# Altium PCB HK0J2071758B02-AM-FPC-A1.PcbDoc (part 1 of 2)
Units mm, origin at the board's own origin, x right, y up, seen from the top; angles counter-clockwise.
Board outline 42.12 x 32.69 mm, 10 copper layers (TopLayer, MidLayer1, MidLayer2, MidLayer3, MidLayer4, MidLayer5, MidLayer6, MidLayer7, MidLayer8, BottomLayer); 37 components, 50 nets, 198 pads, 150 vias.
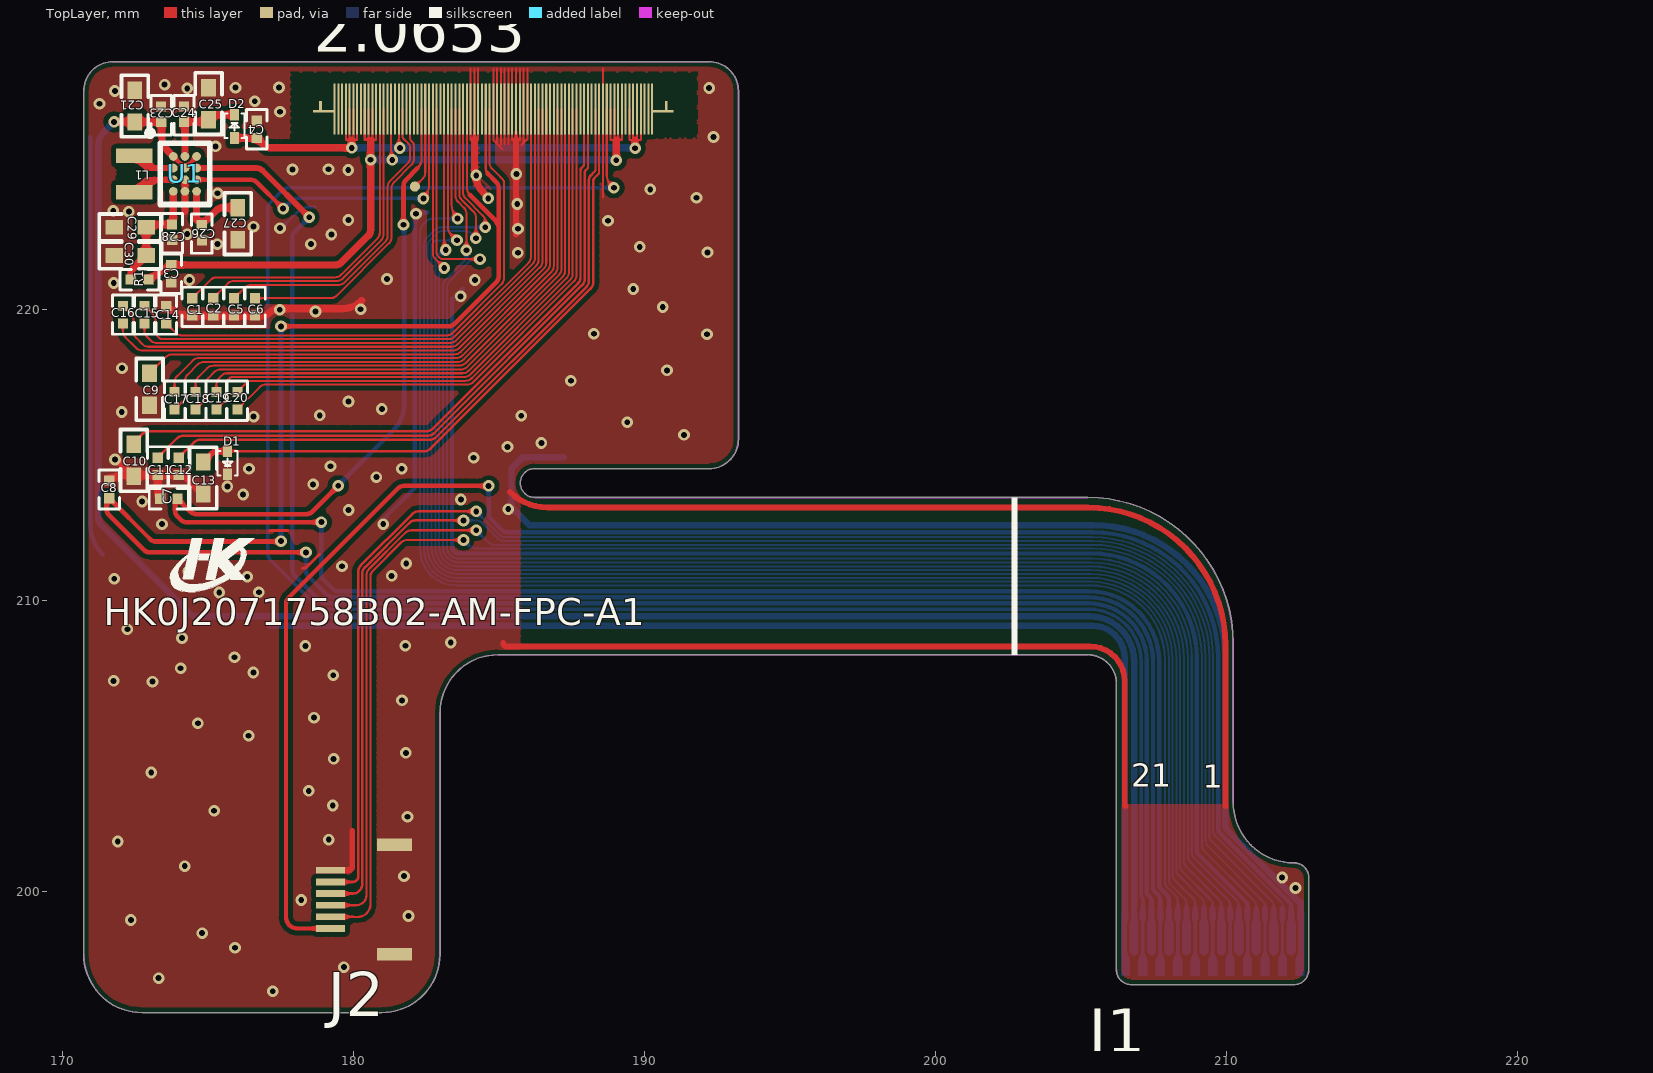
[diagram p0: TopLayer view]
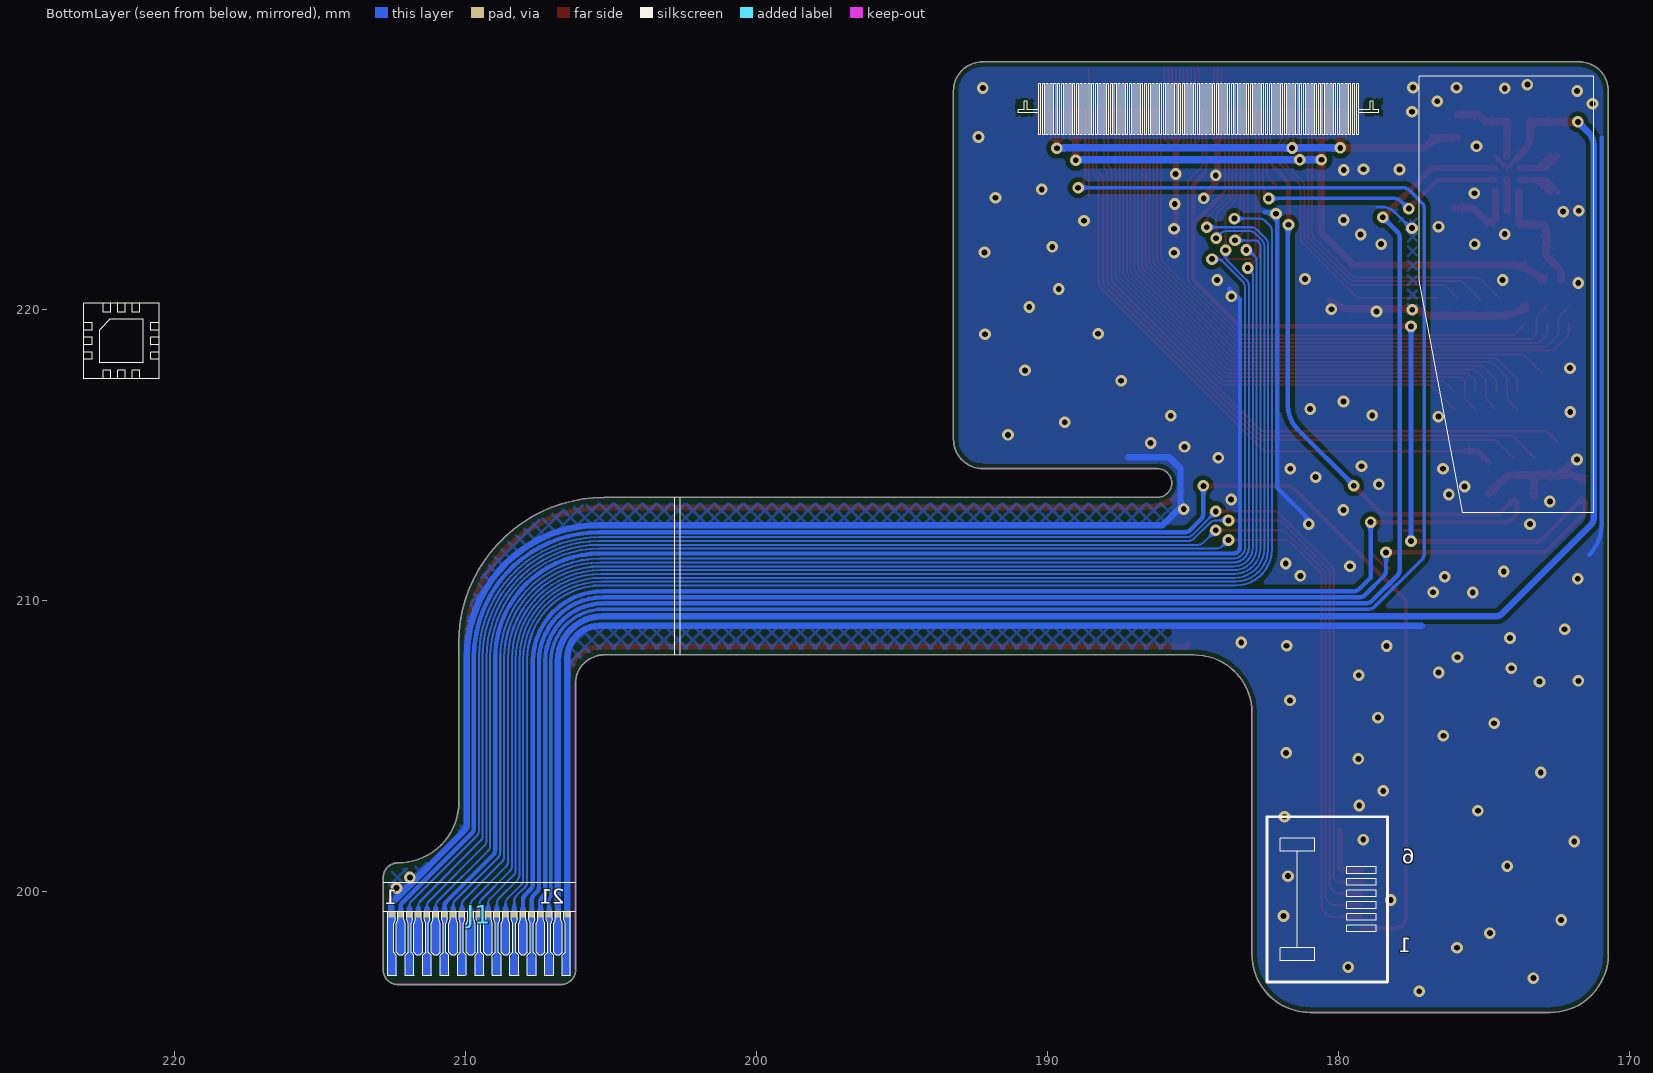
[diagram p1: BottomLayer view, seen from below]

## Layer stack, top to bottom
TopSolder: solder mask 0.0102, Solder Resist, Dk 3.5
TopLayer: signal copper 0.0356
Dielectric1: core 0.32, FR-4, Dk 4.8
MidLayer1: signal copper 0.0356
Dielectric2: prepreg 0.32, FR-4, Dk 4.8
MidLayer2: signal copper 0.0356
Dielectric3: core 0.32, FR-4, Dk 4.8
MidLayer3: signal copper 0.0356
Dielectric4: prepreg 0.32, FR-4, Dk 4.8
MidLayer4: signal copper 0.0356
Dielectric5: core 0.32, FR-4, Dk 4.8
MidLayer5: signal copper 0.0356
Dielectric6: prepreg 0.32, FR-4, Dk 4.8
MidLayer6: signal copper 0.0356
Dielectric7: core 0.32, FR-4, Dk 4.8
MidLayer7: signal copper 0.0356
Dielectric8: prepreg 0.32, FR-4, Dk 4.8
MidLayer8: signal copper 0.0356
Dielectric9: core 0.32, FR-4, Dk 4.8
BottomLayer: signal copper 0.0356
BottomSolder: solder mask 0.0102, Solder Resist, Dk 3.5

## Board outline
172.73,195.824 cw(c172.73,197.83) 170.724,197.83 cw(c170.73,197.83) 170.724,197.831 170.724,227.509 cw(c171.73,227.509) 171.73,228.516 192.23,228.516 cw(c192.23,227.509) 193.237,227.509 193.237,215.53 cw(c192.23,215.53) 192.23,214.524 186.23,214.524 ccw(c186.23,214.53) 186.23,214.524 ccw(c186.23,214.03) 186.23,213.537 205.235,213.537 cw(c205.235,208.53) 210.241,208.53 210.241,203.067 cw(c210.235,203.067) 210.241,203.067 cw(c212.335,203.067) 210.241,203.067 ccw(c212.335,203.067) 212.335,200.974 cw(c212.335,200.967) 212.335,200.974 cw(c212.331,200.421) 212.355,200.973 cw(c212.331,200.427) 212.369,200.973 cw(c212.331,200.432) 212.38,200.972 cw(c212.38,200.965) 212.381,200.972 cw(c212.332,200.438) 212.391,200.971 cw(c212.39,200.964) 212.391,200.971 212.4,200.97 ccw(c212.399,200.963) 212.4,200.97 cw(c212.399,200.963) 212.4,200.97 212.408,200.968 cw(c212.407,200.962) 212.408,200.968 212.416,200.967 cw(c212.415,200.961) 212.416,200.967 212.423,200.966 cw(c212.422,200.959) 212.424,200.966 cw(c212.422,200.959) 212.424,200.966 212.431,200.965 cw(c212.429,200.958) 212.431,200.965 cw(c212.429,200.958) 212.431,200.965 212.437,200.963 cw(c212.436,200.957) 212.438,200.963 212.444,200.962 cw(c212.443,200.955) 212.444,200.962 212.45,200.96 ccw(c212.449,200.954) 212.45,200.96 212.456,200.959 cw(c212.455,200.952) 212.457,200.959 212.462,200.958 212.468,200.956 cw(c212.466,200.949) 212.468,200.956 212.474,200.954 cw(c212.472,200.948) 212.474,200.954 cw(c212.472,200.948) 212.474,200.954 cw(c212.473,200.948) 212.475,200.954 cw(c212.473,200.948) 212.475,200.954 cw(c212.337,200.476) 212.504,200.945 cw(c212.337,200.476) 212.504,200.945 cw(c212.332,200.461) 212.627,200.881 cw(c212.623,200.876) 212.627,200.881 ccw(c212.338,200.47) 212.627,200.881 cw(c212.338,200.47) 212.749,200.759 cw(c212.743,200.755) 212.749,200.759 cw(c212.329,200.464) 212.812,200.636 cw(c212.806,200.634) 212.812,200.636 cw(c212.344,200.47) 212.822,200.607 cw(c212.815,200.605) 212.822,200.607 212.823,200.601 ccw(c212.817,200.6) 212.823,200.601 cw(c212.817,200.6) 212.823,200.601 212.825,200.596 212.825,200.595 212.826,200.589 cw(c212.82,200.588) 212.827,200.589 212.828,200.583 cw(c212.821,200.582) 212.828,200.583 cw(c212.821,200.582) 212.828,200.583 212.829,200.577 cw(c212.823,200.575) 212.829,200.577 cw(c212.823,200.575) 212.829,200.577 212.831,200.57 cw(c212.824,200.569) 212.831,200.57 212.832,200.563 cw(c212.826,200.562) 212.832,200.563 212.833,200.556 cw(c212.827,200.555) 212.834,200.556 212.835,200.549 ccw(c212.828,200.548) 212.835,200.549 212.836,200.541 cw(c212.829,200.54) 212.836,200.541 212.837,200.532 cw(c212.83,200.531) 212.837,200.532 cw(c212.31,200.465) 212.838,200.523 cw(c212.305,200.464) 212.839,200.512 cw(c212.3,200.464) 212.84,200.501 cw(c212.833,200.5) 212.84,200.5 212.84,200.501 cw(c212.294,200.463) 212.841,200.486 cw(c212.289,200.463) 212.841,200.467 cw(c212.835,200.467) 212.841,200.467 212.841,197.292 cw(c212.835,197.292) 212.841,197.292 ccw(c212.335,197.292) 212.841,197.292 cw(c212.335,197.292) 212.335,196.785 206.735,196.785 cw(c206.735,197.292) 206.228,197.292 cw(c206.735,197.292) 206.228,197.292 ccw(c206.235,197.292) 206.228,197.292 206.228,207.13 ccw(c205.175,207.126) 206.228,207.13 ccw(c205.175,207.126) 206.227,207.177 ccw(c205.175,207.126) 206.227,207.177 ccw(c206.233,207.177) 206.227,207.177 ccw(c205.186,207.126) 206.225,207.207 ccw(c205.186,207.126) 206.225,207.207 cw(c206.232,207.207) 206.225,207.207 cw(c205.196,207.127) 206.225,207.207 ccw(c206.232,207.207) 206.225,207.207 ccw(c205.196,207.127) 206.223,207.231 ccw(c205.206,207.128) 206.223,207.231 ccw(c205.206,207.128) 206.22,207.252 ccw(c205.206,207.128) 206.22,207.252 ccw(c205.217,207.129) 206.218,207.271 ccw(c205.217,207.129) 206.218,207.271 ccw(c205.217,207.129) 206.218,207.271 ccw(c206.225,207.272) 206.218,207.271 206.215,207.288 206.213,207.304 206.21,207.319 206.207,207.333 206.204,207.347 cw(c206.211,207.349) 206.204,207.347 206.201,207.36 206.201,207.362 ccw(c205.244,207.133) 206.182,207.429 ccw(c205.244,207.133) 206.182,207.429 cw(c206.188,207.431) 206.182,207.429 cw(c205.227,207.127) 206.182,207.429 ccw(c206.188,207.431) 206.182,207.429 ccw(c205.227,207.127) 206.116,207.589 ccw(c205.227,207.127) 206.116,207.589 cw(c206.122,207.592) 206.116,207.589 ccw(c205.241,207.134) 206.082,207.649 ccw(c205.235,207.13) 205.754,207.977 cw(c205.757,207.983) 205.753,207.977 ccw(c205.239,207.137) 205.693,208.011 ccw(c205.239,207.137) 205.693,208.011 ccw(c205.231,207.122) 205.534,208.077 ccw(c205.231,207.122) 205.534,208.078 ccw(c205.536,208.084) 205.534,208.077 205.534,208.078 ccw(c205.237,207.14) 205.534,208.078 ccw(c205.237,207.14) 205.467,208.096 ccw(c205.237,207.14) 205.466,208.096 cw(c205.468,208.103) 205.466,208.096 205.453,208.099 205.439,208.102 205.425,208.105 205.41,208.108 205.394,208.111 cw(c205.235,207.123) 205.394,208.111 ccw(c205.235,207.123) 205.376,208.113 cw(c205.377,208.12) 205.376,208.113 ccw(c205.234,207.113) 205.358,208.116 ccw(c205.234,207.113) 205.357,208.116 ccw(c205.358,208.123) 205.358,208.116 205.357,208.116 ccw(c205.233,207.103) 205.337,208.118 ccw(c205.232,207.092) 205.336,208.118 ccw(c205.232,207.092) 205.312,208.12 cw(c205.313,208.127) 205.312,208.12 ccw(c205.231,207.082) 205.283,208.122 ccw(c205.231,207.082) 205.282,208.122 ccw(c205.23,207.07) 205.236,208.124 205.235,208.124 ccw(c205.235,208.13) 205.235,208.124 ccw(c205.236,208.13) 205.236,208.124 205.235,208.124 184.97,208.124 ccw(c184.97,206.13) 182.977,206.13 182.977,197.83 ccw(c182.97,197.83) 182.977,197.831 182.977,197.83 cw(c180.97,197.83) 180.97,195.824

## Design rules (kind name [scope] priority, off if disabled: settings)
Clearance [All] p1: gap=0.06 ignorepadtopadclearanceinfootprint=FALSE
ComponentClearance [All] p1: gap=-0.04 collisioncheckmode=3 verticalgap=-0.04 showdistances=FALSE
FabricationTestPointUsage TestPointUsage [All] p1: valid=0 allowmultiple=FALSE
FabricationTestpoint Testpoint [All] p1: side=3 testpointundercomponent=TRUE minsize=1.016 maxsize=2.54 preferedsize=1.524 minholesize=0.508 maxholesize=1.016 preferedholesize=0.813 testpointgrid=0.025 allowsidetop=TRUE allowsidebottom=TRUE usegrid=TRUE gridtolerance=0
PasteMaskExpansion PasteMaskExpansion_1 [InComponent('P1')] p1: expansion=-3.81
PasteMaskExpansion [All] p2: expansion=0
PlaneClearance [All] p1: clearance=0.254
PolygonConnect [All] p1: connectstyle=Direct reliefconductorwidth=0.254 reliefentries=4 polygonreliefangle="90 Angle" airgapwidth=0.254
RoutingVias [All] p1: holewidth=0.711 width=1.27 viastyle="Through Hole" minholewidth=0.711 minwidth=1.27 maxholewidth=0.711 maxwidth=1.27
SilkToSolderMaskClearance SilkscreenOverComponentPads [IsPad] p1: minsilkscreentomaskgap=0.254 clearancetoexposedcopper=TRUE
SolderMaskExpansion [All] p1: expansion=0.051
Width [All] p1: maxlimit=0.254 minlimit=0.06 preferedwidth=0.254
24 further rules are at their usual default settings.

## Classes and differential pairs
component class "AT long bus (13.3 x 4.5 inches)": P?

## Components (designator, comment, footprint, x,y, rotation, side; value= is the part's Value field where it differs from the comment)
2.0653 "2.0653-CH13613" GVO2.08-CH13613 184.186,223.315 r0 top
C1 "CAP" 0201-FPC#1 174.494,220.584 r270 top
C2 "CAP" 0201-FPC#1 175.214,220.584 r270 top
C3 "CAP" 0201-FPC#1 173.775,221.727 r270 top
C4 "CAP" 0201-FPC#1 176.639,225.694 r90 top
C5 "CAP" 0201-FPC#1 175.934,220.584 r270 top
C6 "CAP" 0201-FPC#1 176.654,220.584 r270 top
C7 "CAP" 0201-FPC#1 174.154,213.449 r180 top
C8 "CAP" 0201-FPC#1 171.566,213.308 r90 top
C9 "CAP" 0402-FPC 172.991,217.802 r270 top
C10 "CAP" 0402-FPC 172.447,215.361 r270 top
C11 "CAP" 0201-FPC#1 173.308,215.101 r270 top
C12 "CAP" 0201-FPC#1 174.028,215.101 r270 top
C13 "CAP" 0402-FPC 174.834,214.753 r270 top
C14 "CAP" 0201-FPC#1 173.527,219.318 r90 top
C15 "CAP" 0201-FPC#1 172.853,220.318 r270 top
C16 "CAP" 0201-FPC#1 172.109,220.318 r270 top
C17 "CAP" 0201-FPC#1 173.885,217.36 r270 top
C18 "CAP" 0201-FPC#1 174.609,217.36 r270 top
C19 "CAP" 0201-FPC#1 175.326,217.36 r270 top
C20 "CAP" 0201-FPC#1 176.045,217.36 r270 top
C21 "CAP" 0402-FPC 172.484,226.44 r90 top
C23 "CAP" 0201-FPC#2 173.35,226.171 r90 top
C24 "CAP" 0201-FPC#2 174.136,226.174 r90 top
C25 "CAP" 0402-FPC 175.017,226.523 r90 top
C26 "CAP" 0201-FPC#2 174.749,222.103 r90 top
C27 "CAP" 0402-FPC 176.025,222.396 r90 top
C28 "CAP" 0201-FPC#2 173.729,222.118 r90 top
C29 "CAP" 0402-FPC 172.873,222.821 r180 top
C30 "CAP" 0402-FPC 172.873,221.854 r180 top
D1 "RB520G-30" SOD-923 176.014,217.055 r270 top
D2 "RB520G-30" SOD-923 175.568,223.963 r90 top
J1 "OK-23GM024-04" FH26-21 208.819,199.176 r0 top
J2 "TP" OK-F401-06125 179.211,198.715 r90 top
L1 "Power Inductor" MPL2012S2R2MDT 200.403,348.491 r90 top
R1 "10Ω/0402" 0201-FPC#1 173.144,220.985 r180 top
U1 "BV6810A" BV6810A 148.28,282.781 r0 top

## Footprints (in the part's own frame and the unit in brackets; to place one, negate y for a bottom-side part, rotate by r counter-clockwise, add the part's x,y. Pads: shape width x height; smd on the part's side, far side on the other; paste and mask are expansions set on the pad)
0201-FPC#1 [mm]
  rect 0.35x0.35 smd: 1(0.2,-0.037) 2(0.8,-0.037)
  silkscreen extent -0.18,-0.39 1.17,0.31
0201-FPC#2 [mm]
  rect 0.35x0.35 smd: 1(0.273,-0.04) 2(0.8,-0.037)
  silkscreen extent -0.18,-0.39 1.17,0.31
0402-FPC [mm]
  rect 0.6x0.508 smd: 1(0,0) 2(1.1,0)
  silkscreen extent -0.51,-0.46 1.61,0.46
BV6810A [mm]
  round 0.3 smd: A1(25.526,-57.523) A2(25.926,-57.523) A3(26.326,-57.523) B1(25.526,-57.923) B2(25.926,-57.923) B3(26.326,-57.923) C1(25.526,-58.323) C2(25.926,-58.323) C3(26.326,-58.323) D1(25.526,-58.723) D2(25.926,-58.723) D3(26.326,-58.723)
  silkscreen extent 24.63,-59.17 26.78,-56.62
FH26-21 [mm]
  rect 0.2x0.2 smd far side: 1(3.742,0.017) 1(3.742,0.017) 2(3.417,0.017) 3(3.117,0.017) 4(2.817,0.017) 5(2.517,0.017) 6(2.217,0.017) 7(1.917,0.017) 8(1.617,0.017) 9(1.317,0.017) 10(1.017,0.017) 11(0.717,0.017) 12(0.417,0.017) 13(0.117,0.017) 14(-0.183,0.017) 15(-0.483,0.017) 16(-0.783,0.017) 17(-1.083,0.017) 18(-1.383,0.017) 19(-1.683,0.017) 20(-1.983,0.017) 21(-2.308,0.017)
  BottomLayer region: -0.633,-2.083 -0.633,-1.584 -0.628,-1.526 -0.611,-1.469 -0.611,-1.469 -0.556,-1.338 -0.539,-1.282 -0.533,-1.223 -0.533,-1.223 -0.533,-0.316 -0.536,-0.284 -0.544,-0.252 -0.544,-0.252 -0.578,-0.149 -0.582,-0.133 -0.583,-0.117 -0.583,-0.117 -0.583,0.117 -0.383,0.117 -0.383,-0.117 -0.385,-0.133 -0.389,-0.149 -0.389,-0.149 -0.423,-0.252 -0.431,-0.284 -0.433,-0.316 -0.433,-0.316 -0.433,-1.223 -0.428,-1.282 -0.411,-1.338 -0.411,-1.338 -0.356,-1.469 -0.339,-1.526 -0.333,-1.584 -0.333,-1.584 -0.333,-2.083
  BottomLayer region: 1.167,-2.083 1.167,-1.584 1.172,-1.526 1.189,-1.469 1.189,-1.469 1.244,-1.338 1.261,-1.282 1.267,-1.223 1.267,-1.223 1.267,-0.316 1.264,-0.284 1.256,-0.252 1.256,-0.252 1.222,-0.149 1.218,-0.133 1.217,-0.117 1.217,-0.117 1.217,0.117 1.417,0.117 1.417,-0.117 1.415,-0.133 1.411,-0.149 1.411,-0.149 1.377,-0.252 1.369,-0.284 1.367,-0.316 1.367,-0.316 1.367,-1.223 1.372,-1.282 1.389,-1.338 1.389,-1.338 1.444,-1.469 1.461,-1.526 1.467,-1.584 1.467,-1.584 1.467,-2.083
  BottomLayer region: 3.296,-1.312 3.274,-1.28 3.267,-1.242 3.267,-1.242 3.267,-0.332 3.27,-0.284 3.282,-0.237 3.282,-0.237 3.301,-0.179 3.313,-0.132 3.317,-0.084 3.317,-0.084 3.317,0.117 3.517,0.117 3.517,-0.084 3.52,-0.132 3.532,-0.179 3.532,-0.179 3.551,-0.237 3.563,-0.284 3.567,-0.332 3.567,-0.332 3.567,-1.242 3.559,-1.28 3.537,-1.312 3.537,-1.312 3.467,-1.383 3.367,-1.383
  BottomLayer region: -1.833,-2.083 -1.833,-1.584 -1.828,-1.526 -1.811,-1.469 -1.811,-1.469 -1.756,-1.338 -1.739,-1.282 -1.733,-1.223 -1.733,-1.223 -1.733,-0.316 -1.736,-0.284 -1.744,-0.252 -1.744,-0.252 -1.778,-0.149 -1.782,-0.133 -1.783,-0.117 -1.783,-0.117 -1.783,0.117 -1.583,0.117 -1.583,-0.117 -1.585,-0.133 -1.589,-0.149 -1.589,-0.149 -1.623,-0.252 -1.631,-0.284 -1.633,-0.316 -1.633,-0.316 -1.633,-1.223 -1.628,-1.282 -1.611,-1.338 -1.611,-1.338 -1.556,-1.469 -1.539,-1.526 -1.533,-1.584 -1.533,-1.584 -1.533,-2.083
  BottomLayer region: -2.104,-1.312 -2.126,-1.28 -2.133,-1.242 -2.133,-1.242 -2.133,-0.332 -2.13,-0.284 -2.118,-0.237 -2.118,-0.237 -2.099,-0.179 -2.087,-0.132 -2.083,-0.084 -2.083,-0.084 -2.083,0.117 -1.883,0.117 -1.883,-0.084 -1.88,-0.132 -1.868,-0.179 -1.868,-0.179 -1.849,-0.237 -1.837,-0.284 -1.833,-0.332 -1.833,-0.332 -1.833,-1.242 -1.841,-1.28 -1.863,-1.312 -1.863,-1.312 -1.933,-1.383 -2.033,-1.383
  BottomLayer region: -1.504,-1.312 -1.526,-1.28 -1.533,-1.242 -1.533,-1.242 -1.533,-0.332 -1.53,-0.284 -1.518,-0.237 -1.518,-0.237 -1.499,-0.179 -1.487,-0.132 -1.483,-0.084 -1.483,-0.084 -1.483,0.117 -1.283,0.117 -1.283,-0.084 -1.28,-0.132 -1.268,-0.179 -1.268,-0.179 -1.249,-0.237 -1.237,-0.284 -1.233,-0.332 -1.233,-0.332 -1.233,-1.242 -1.241,-1.28 -1.263,-1.312 -1.263,-1.312 -1.333,-1.383 -1.433,-1.383
  BottomLayer region: -1.233,-2.083 -1.233,-1.584 -1.228,-1.526 -1.211,-1.469 -1.211,-1.469 -1.156,-1.338 -1.139,-1.282 -1.133,-1.223 -1.133,-1.223 -1.133,-0.316 -1.136,-0.284 -1.144,-0.252 -1.144,-0.252 -1.178,-0.149 -1.182,-0.133 -1.183,-0.117 -1.183,-0.117 -1.183,0.117 -0.983,0.117 -0.983,-0.117 -0.985,-0.133 -0.989,-0.149 -0.989,-0.149 -1.023,-0.252 -1.031,-0.284 -1.033,-0.316 -1.033,-0.316 -1.033,-1.223 -1.028,-1.282 -1.011,-1.338 -1.011,-1.338 -0.956,-1.469 -0.939,-1.526 -0.933,-1.584 -0.933,-1.584 -0.933,-2.083
  BottomLayer region: -0.904,-1.312 -0.926,-1.28 -0.933,-1.242 -0.933,-1.242 -0.933,-0.332 -0.93,-0.284 -0.918,-0.237 -0.918,-0.237 -0.899,-0.179 -0.887,-0.132 -0.883,-0.084 -0.883,-0.084 -0.883,0.117 -0.683,0.117 -0.683,-0.084 -0.68,-0.132 -0.668,-0.179 -0.668,-0.179 -0.649,-0.237 -0.637,-0.284 -0.633,-0.332 -0.633,-0.332 -0.633,-1.242 -0.641,-1.28 -0.663,-1.312 -0.663,-1.312 -0.733,-1.383 -0.833,-1.383
  BottomLayer region: -2.433,-2.083 -2.433,0.117 -2.183,0.117 -2.183,-0.101 -2.186,-0.133 -2.194,-0.164 -2.194,-0.164 -2.223,-0.252 -2.231,-0.284 -2.233,-0.316 -2.233,-0.316 -2.233,-1.223 -2.228,-1.282 -2.211,-1.338 -2.211,-1.338 -2.156,-1.469 -2.139,-1.526 -2.133,-1.584 -2.133,-1.584 -2.133,-2.083
  BottomLayer region: -0.304,-1.312 -0.326,-1.28 -0.333,-1.242 -0.333,-1.242 -0.333,-0.332 -0.33,-0.284 -0.318,-0.237 -0.318,-0.237 -0.299,-0.179 -0.287,-0.132 -0.283,-0.084 -0.283,-0.084 -0.283,0.117 -0.083,0.117 -0.083,-0.084 -0.08,-0.132 -0.068,-0.179 -0.068,-0.179 -0.049,-0.237 -0.037,-0.284 -0.033,-0.332 -0.033,-0.332 -0.033,-1.242 -0.041,-1.28 -0.063,-1.312 -0.063,-1.312 -0.133,-1.383 -0.233,-1.383
  BottomLayer region: -0.033,-2.083 -0.033,-1.584 -0.028,-1.526 -0.011,-1.469 -0.011,-1.469 0.044,-1.338 0.061,-1.282 0.067,-1.223 0.067,-1.223 0.067,-0.316 0.064,-0.284 0.056,-0.252 0.056,-0.252 0.022,-0.149 0.018,-0.133 0.017,-0.117 0.017,-0.117 0.017,0.117 0.217,0.117 0.217,-0.117 0.215,-0.133 0.211,-0.149 0.211,-0.149 0.177,-0.252 0.169,-0.284 0.167,-0.316 0.167,-0.316 0.167,-1.223 0.172,-1.282 0.189,-1.338 0.189,-1.338 0.244,-1.469 0.261,-1.526 0.267,-1.584 0.267,-1.584 0.267,-2.083
  BottomLayer region: 0.296,-1.312 0.274,-1.28 0.267,-1.242 0.267,-1.242 0.267,-0.332 0.27,-0.284 0.282,-0.237 0.282,-0.237 0.301,-0.179 0.313,-0.132 0.317,-0.084 0.317,-0.084 0.317,0.117 0.517,0.117 0.517,-0.084 0.52,-0.132 0.532,-0.179 0.532,-0.179 0.551,-0.237 0.563,-0.284 0.567,-0.332 0.567,-0.332 0.567,-1.242 0.559,-1.28 0.537,-1.312 0.537,-1.312 0.467,-1.383 0.367,-1.383
  BottomLayer region: 0.567,-2.083 0.567,-1.584 0.572,-1.526 0.589,-1.469 0.589,-1.469 0.644,-1.338 0.661,-1.282 0.667,-1.223 0.667,-1.223 0.667,-0.316 0.664,-0.284 0.656,-0.252 0.656,-0.252 0.622,-0.149 0.618,-0.133 0.617,-0.117 0.617,-0.117 0.617,0.117 0.817,0.117 0.817,-0.117 0.815,-0.133 0.811,-0.149 0.811,-0.149 0.777,-0.252 0.769,-0.284 0.767,-0.316 0.767,-0.316 0.767,-1.223 0.772,-1.282 0.789,-1.338 0.789,-1.338 0.844,-1.469 0.861,-1.526 0.867,-1.584 0.867,-1.584 0.867,-2.083
  BottomLayer region: 0.896,-1.312 0.874,-1.28 0.867,-1.242 0.867,-1.242 0.867,-0.332 0.87,-0.284 0.882,-0.237 0.882,-0.237 0.901,-0.179 0.913,-0.132 0.917,-0.084 0.917,-0.084 0.917,0.117 1.117,0.117 1.117,-0.084 1.12,-0.132 1.132,-0.179 1.132,-0.179 1.151,-0.237 1.163,-0.284 1.167,-0.332 1.167,-0.332 1.167,-1.242 1.159,-1.28 1.137,-1.312 1.137,-1.312 1.067,-1.383 0.967,-1.383
  BottomLayer region: 1.496,-1.312 1.474,-1.28 1.467,-1.242 1.467,-1.242 1.467,-0.332 1.47,-0.284 1.482,-0.237 1.482,-0.237 1.501,-0.179 1.513,-0.132 1.517,-0.084 1.517,-0.084 1.517,0.117 1.717,0.117 1.717,-0.084 1.72,-0.132 1.732,-0.179 1.732,-0.179 1.751,-0.237 1.763,-0.284 1.767,-0.332 1.767,-0.332 1.767,-1.242 1.759,-1.28 1.737,-1.312 1.737,-1.312 1.667,-1.383 1.567,-1.383
  BottomLayer region: 1.767,-2.083 1.767,-1.584 1.772,-1.526 1.789,-1.469 1.789,-1.469 1.844,-1.338 1.861,-1.282 1.867,-1.223 1.867,-1.223 1.867,-0.316 1.864,-0.284 1.856,-0.252 1.856,-0.252 1.822,-0.149 1.818,-0.133 1.817,-0.117 1.817,-0.117 1.817,0.117 2.017,0.117 2.017,-0.117 2.015,-0.133 2.011,-0.149 2.011,-0.149 1.977,-0.252 1.969,-0.284 1.967,-0.316 1.967,-0.316 1.967,-1.223 1.972,-1.282 1.989,-1.338 1.989,-1.338 2.044,-1.469 2.061,-1.526 2.067,-1.584 2.067,-1.584 2.067,-2.083
  BottomLayer region: 2.096,-1.312 2.074,-1.28 2.067,-1.242 2.067,-1.242 2.067,-0.332 2.07,-0.284 2.082,-0.237 2.082,-0.237 2.101,-0.179 2.113,-0.132 2.117,-0.084 2.117,-0.084 2.117,0.117 2.317,0.117 2.317,-0.084 2.32,-0.132 2.332,-0.179 2.332,-0.179 2.351,-0.237 2.363,-0.284 2.367,-0.332 2.367,-0.332 2.367,-1.242 2.359,-1.28 2.337,-1.312 2.337,-1.312 2.267,-1.383 2.167,-1.383
  BottomLayer region: 2.367,-2.083 2.367,-1.584 2.372,-1.526 2.389,-1.469 2.389,-1.469 2.444,-1.338 2.461,-1.282 2.467,-1.223 2.467,-1.223 2.467,-0.316 2.464,-0.284 2.456,-0.252 2.456,-0.252 2.422,-0.149 2.418,-0.133 2.417,-0.117 2.417,-0.117 2.417,0.117 2.617,0.117 2.617,-0.117 2.615,-0.133 2.611,-0.149 2.611,-0.149 2.577,-0.252 2.569,-0.284 2.567,-0.316 2.567,-0.316 2.567,-1.223 2.572,-1.282 2.589,-1.338 2.589,-1.338 2.644,-1.469 2.661,-1.526 2.667,-1.584 2.667,-1.584 2.667,-2.083
  BottomLayer region: 2.696,-1.312 2.674,-1.28 2.667,-1.242 2.667,-1.242 2.667,-0.332 2.67,-0.284 2.682,-0.237 2.682,-0.237 2.701,-0.179 2.713,-0.132 2.717,-0.084 2.717,-0.084 2.717,0.117 2.917,0.117 2.917,-0.084 2.92,-0.132 2.932,-0.179 2.932,-0.179 2.951,-0.237 2.963,-0.284 2.967,-0.332 2.967,-0.332 2.967,-1.242 2.959,-1.28 2.937,-1.312 2.937,-1.312 2.867,-1.383 2.767,-1.383
  BottomLayer region: 2.967,-2.083 2.967,-1.584 2.972,-1.526 2.989,-1.469 2.989,-1.469 3.044,-1.338 3.061,-1.282 3.067,-1.223 3.067,-1.223 3.067,-0.316 3.064,-0.284 3.056,-0.252 3.056,-0.252 3.022,-0.149 3.018,-0.133 3.017,-0.117 3.017,-0.117 3.017,0.117 3.217,0.117 3.217,-0.117 3.215,-0.133 3.211,-0.149 3.211,-0.149 3.177,-0.252 3.169,-0.284 3.167,-0.316 3.167,-0.316 3.167,-1.223 3.172,-1.282 3.189,-1.338 3.189,-1.338 3.244,-1.469 3.261,-1.526 3.267,-1.584 3.267,-1.584 3.267,-2.083
  BottomLayer region: 3.567,-2.083 3.567,-1.584 3.572,-1.526 3.589,-1.469 3.589,-1.469 3.644,-1.338 3.661,-1.282 3.667,-1.223 3.667,-1.223 3.667,-0.316 3.664,-0.284 3.656,-0.252 3.656,-0.252 3.627,-0.164 3.619,-0.133 3.617,-0.101 3.617,-0.101 3.617,0.117 3.867,0.117 3.867,-2.083
GVO2.08-CH13613 [mm]
  rect 0.1x0.35 smd: 1(-5.323,3.671) 1(6.566,3.67)
  rect 0.7x0.1 smd: 1(-5.221,3.495) 1(6.465,3.495)
  rect 0.07x1.75 smd: 1(-4.84,3.572) 2(-4.71,3.572) 3(-4.58,3.572) 4(-4.45,3.572) 5(-4.32,3.572) 6(-4.19,3.572) 7(-4.06,3.572) 8(-3.93,3.572) 9(-3.8,3.572) 10(-3.67,3.572) 11(-3.54,3.572) 12(-3.41,3.572) 13(-3.28,3.572) 14(-3.15,3.572) 15(-3.02,3.572) 16(-2.89,3.572) 17(-2.76,3.572) 18(-2.63,3.572) 19(-2.5,3.572) 20(-2.37,3.572) 21(-2.24,3.572) 22(-2.11,3.572) 23(-1.98,3.572) 24(-1.85,3.572) 25(-1.72,3.572) 26(-1.59,3.572) 27(-1.46,3.572) 28(-1.33,3.572) 29(-1.2,3.572) 30(-1.07,3.572) 31(-0.94,3.572) 32(-0.81,3.572) 33(-0.68,3.572) 34(-0.55,3.572) 35(-0.42,3.572) 36(-0.29,3.572) 37(-0.16,3.572) 38(-0.03,3.572) 39(0.1,3.572) 40(0.23,3.572) 41(0.36,3.572) 42(0.49,3.572) 43(0.62,3.572) 44(0.75,3.572) 45(0.88,3.572) 46(1.01,3.572) 47(1.14,3.572) 48(1.27,3.572) 49(1.4,3.572) 50(1.53,3.572) 51(1.66,3.572) 52(1.79,3.572) 53(1.92,3.572) 54(2.05,3.572) 55(2.18,3.572) 56(2.31,3.572) 57(2.44,3.572) 58(2.57,3.572) 59(2.7,3.572) 60(2.83,3.572) 61(2.96,3.572) 62(3.09,3.572) 63(3.22,3.572) 64(3.35,3.572) 65(3.48,3.572) 66(3.61,3.572) 67(3.74,3.572) 68(3.87,3.572) 69(4,3.572) 70(4.13,3.572) 71(4.26,3.572) 72(4.39,3.572) 73(4.52,3.572) 74(4.65,3.572) 75(4.78,3.572) 76(4.91,3.572) 77(5.04,3.572) 78(5.17,3.572) 79(5.3,3.572) 80(5.43,3.572) 81(5.56,3.572) 82(5.69,3.572) 83(5.82,3.572) 84(5.95,3.572) 85(6.08,3.572)
MPL2012S2R2MDT [mm]
  rect 0.5x1.25 smd: 1(-124.46,27.94) 2(-123.21,27.94)
OK-F401-06125 [mm]
  rect 0.43x1.2 smd: 1(-0.879,-2.202) 1(2.88,-2.202)
  rect 0.23x1 smd: 1(2.001,0) 2(1.601,0) 3(1.201,0) 4(0.801,0) 5(0.401,0) 6(0.001,0)
SOD-923 [mm]
  rect 0.4x0.3 smd: 1(1.929,-0.342) 2(2.729,-0.342)
  silkscreen extent 1.93,-0.68 2.77,0

## Part data
D1 D2: library part "DIODE VARACTOR"
J1: library part 24PIN
J2: library part 6PIN
R1: library part 电阻

## Free pads (board coordinates)
  round 0.35 smd: 3(182.11,224.222)

## Via types
v1: diameter 0.4, hole 0.2, TopLayer to BottomLayer, 150 vias

## Nets (pads, with @x,y where several pads share a name; then routed paths per layer and width w, separated by ;. In a path a pad name is that pad's centre, name@x,y a point inside that pad or via, vN(x,y) a via of type N, cw(c..) or ccw(c..) an arc to the next point about the centre after c; other vN are vias at no path point)
AVDD: 2.0653.57 C9.1 | length 20.5
  TopLayer w0.07: C9.1@172.991,217.802 173.555,218.366 cw(c173.767,218.154) 173.767,218.454 183.477,218.454 ccw(c183.477,218.754) 183.689,218.542 186.539,221.392 ccw(c186.327,221.604) 186.627,221.604 2.0653.57@186.627,226.886
AVEE: 2.0653.19 C5.1 | length 10.9
  TopLayer w0.07: C5.1@175.896,220.384 176.256,220.744 cw(c176.469,220.532) 176.469,220.832 179.476,220.832 ccw(c179.476,221.132) 179.688,220.92 181.089,222.32 ccw(c180.877,222.533) 181.177,222.533 181.177,224.212 cw(c181.477,224.212) 181.264,224.424 181.862,225.021 ccw(c181.649,225.233) 181.949,225.233 181.949,225.536 ccw(c181.699,225.536) 181.876,225.713 181.715,225.874 cw(c181.783,225.942) 181.687,225.942 2.0653.19@181.687,226.886
C11N: 2.0653.54 C15.2 | length 20.3
  TopLayer w0.07: C15.2@172.816,219.518 172.816,219.263 ccw(c173.116,219.263) 172.904,219.051 173.025,218.93 ccw(c173.232,219.137) 173.232,218.844 183.315,218.844 ccw(c183.315,219.144) 183.528,218.932 186.149,221.553 ccw(c185.937,221.765) 186.237,221.765 2.0653.54@186.237,226.886
C11P: 2.0653.53 C15.1 | length 20.4
  TopLayer w0.07: C15.1@172.816,220.118 173.107,219.827 cw(c172.895,219.615) 173.195,219.615 173.195,219.243 ccw(c173.435,219.243) 173.265,219.073 173.323,219.015 ccw(c173.422,219.115) 173.422,218.974 183.262,218.974 ccw(c183.262,219.274) 183.474,219.062 186.019,221.607 ccw(c185.807,221.819) 186.107,221.819 2.0653.53@186.107,226.886
C12N: 2.0653.56 C16.2 | length 21.6
  TopLayer w0.07: C16.2@172.072,219.518 172.072,219.25 ccw(c172.372,219.25) 172.16,219.038 172.525,218.672 ccw(c172.737,218.884) 172.737,218.584 183.423,218.584 ccw(c183.423,218.884) 183.635,218.672 186.409,221.446 ccw(c186.197,221.658) 186.497,221.658 2.0653.56@186.497,226.886
C12P: 2.0653.55 C16.1 | length 21.7
  TopLayer w0.07: C16.1@172.072,220.118 172.355,219.835 cw(c172.143,219.623) 172.443,219.623 ; 172.443,219.623 172.443,219.232 ccw(c172.743,219.232) 172.53,219.02 172.748,218.802 ccw(c172.96,219.014) 172.96,218.714 183.369,218.714 ccw(c183.369,219.014) 183.581,218.802 186.279,221.499 ccw(c186.067,221.712) 186.367,221.712 2.0653.55@186.367,226.886
C21N: 2.0653.59 C17.2 | length 20.9
  TopLayer w0.07: C17.2@173.848,216.56 174.122,216.834 ccw(c173.91,217.046) 174.21,217.046 174.21,217.542 cw(c174.51,217.542) 174.298,217.755 174.65,218.106 cw(c174.862,217.894) 174.862,218.194 183.585,218.194 ccw(c183.585,218.494) 183.797,218.282 186.799,221.284 ccw(c186.587,221.496) 186.887,221.496 2.0653.59@186.887,226.886
C21P: 2.0653.58 C17.1 | length 20.4
  TopLayer w0.07: C17.1@173.848,217.16 173.848,217.491 cw(c174.148,217.491) 173.936,217.703 174.468,218.236 cw(c174.68,218.024) 174.68,218.324 183.531,218.324 ccw(c183.531,218.624) 183.743,218.412 186.669,221.338 ccw(c186.457,221.55) 186.757,221.55 2.0653.58@186.757,226.886
C22N: 2.0653.61 C18.2 | length 20.5
  TopLayer w0.07: C18.2@174.572,216.56 174.843,216.831 ccw(c174.63,217.043) 174.93,217.043 174.93,217.436 cw(c175.23,217.436) 175.018,217.648 175.217,217.846 cw(c175.429,217.634) 175.429,217.934 183.692,217.934 ccw(c183.692,218.234) 183.904,218.022 187.059,221.176 ccw(c186.847,221.388) 187.147,221.388 2.0653.61@187.147,226.886
C22P: 2.0653.60 C18.1 | length 19.9
  TopLayer w0.07: C18.1@174.572,217.16 174.572,217.455 cw(c174.872,217.455) 174.66,217.667 174.969,217.976 cw(c175.181,217.764) 175.181,218.064 183.639,218.064 ccw(c183.639,218.364) 183.851,218.152 186.929,221.23 ccw(c186.717,221.442) 187.017,221.442 2.0653.60@187.017,226.886
C31N: 2.0653.63 C19.2 | length 20.1
  TopLayer w0.07: C19.2@175.289,216.56 175.56,216.831 ccw(c175.348,217.043) 175.648,217.043 175.648,217.457 ; 175.648,217.457 cw(c175.842,217.457) 175.705,217.594 175.752,217.641 cw(c175.832,217.561) 175.832,217.674 183.8,217.674 ccw(c183.8,217.974) 184.012,217.762 187.319,221.069 ccw(c187.107,221.281) 187.407,221.281 2.0653.63@187.407,226.886
C31P: 2.0653.62 C19.1 | length 19.5
  TopLayer w0.07: C19.1@175.289,217.16 175.289,217.42 cw(c175.589,217.42) 175.377,217.632 175.478,217.733 cw(c175.65,217.561) 175.65,217.804 183.746,217.804 ccw(c183.746,218.104) 183.958,217.892 187.189,221.123 ccw(c186.977,221.335) 187.277,221.335 2.0653.62@187.277,226.886
C41N: 2.0653.64 C20.1 | length 18.9
  TopLayer w0.07: C20.1@176.008,217.16 176.304,217.456 cw(c176.516,217.244) 176.516,217.544 183.854,217.544 ccw(c183.854,217.844) 184.066,217.632 187.449,221.015 ccw(c187.237,221.227) 187.537,221.227 2.0653.64@187.537,226.886
C41P: 2.0653.65 C20.2 | length 19.3
  TopLayer w0.07: C20.2@176.008,216.56 176.774,217.326 cw(c176.986,217.114) 176.986,217.414 183.908,217.414 ccw(c183.908,217.714) 184.12,217.502 187.579,220.961 ccw(c187.367,221.173) 187.667,221.173 2.0653.65@187.667,226.886
CS: 2.0653.33 J1.9 | length 52.7
  TopLayer w0.07: 2.0653.33@183.507,226.886 183.507,223.906 ccw(c183.807,223.906) 183.595,223.694 183.794,223.494 cw(c183.582,223.282) 183.882,223.282 v1(183.882,222.031)
  BottomLayer w0.075: v1(183.882,222.031) 183.882,221.857 cw(c183.586,221.857) 183.796,221.648 183.167,221.02 ccw(c183.379,220.807) 183.079,220.807 183.079,211.83 ccw(c183.609,211.83) 183.609,211.3 205.372,211.3 cw(c205.372,207.987) 208.685,207.987 208.685,201.184 ccw(c208.935,201.184) 208.758,201.007 210.064,199.701 cw(c209.892,199.529) 210.136,199.529 210.136,199.386
  BottomLayer w0.2: J1.9@210.136,199.193 210.136,199.386
DVDD: 2.0653.42 C14.1 | length 18.6
  TopLayer w0.07: 2.0653.42@184.677,226.886 184.677,225.044 ccw(c184.977,225.044) 184.765,224.832 185.06,224.536
  TopLayer w0.075: C14.1@173.564,219.518 173.888,219.194 ccw(c174.1,219.407) 174.1,219.107 183.207,219.107 ccw(c183.207,219.407) 183.419,219.194 185.085,220.86 ccw(c184.873,221.072) 185.173,221.072 185.173,224.359 ccw(c185.014,224.359) 185.126,224.471 185.06,224.536
ELVDD: 2.0653.9 2.0653.10 2.0653.11 2.0653.12 2.0653.16 2.0653.74 2.0653.75 2.0653.76 2.0653.77 C3.1 R1.1 | length 32.1
  TopLayer w0.07: 2.0653.9@180.387,226.886 180.387,225.825 180.517,225.825 ; 2.0653.10@180.517,226.886 180.517,225.825 ; 2.0653.11@180.647,226.886 180.647,225.825 ; 2.0653.12@180.777,226.886 180.777,225.825 180.647,225.825 ; v1@181.297,225.111 2.0653.16@181.297,226.886 ; 2.0653.74@188.837,226.886 188.837,225.825 188.967,225.825 ; 2.0653.75@188.967,226.886 188.967,225.825 ; 2.0653.76@189.097,226.886 189.097,225.825 ; 2.0653.77@189.227,226.886 189.227,225.825 189.097,225.825 ; 180.517,225.825 180.647,225.825 ; 188.967,225.825 189.034,225.825 189.097,225.825
  TopLayer w0.25: R1.1@172.944,221.022 C3.1@173.738,221.527 ; 174.218,221.53 174.216,221.527 C3.1@173.738,221.527 ; 180.589,225.801 v1(180.589,225.142) 180.589,222.739 cw(c180.289,222.739) 180.501,222.527 179.589,221.615 cw(c179.376,221.827) 179.376,221.527 C3.1@173.738,221.527 ; v1(189.034,225.128) 189.034,225.825
  BottomLayer w0.25: v1(180.589,225.142) v1@189.034,225.142
  other v1: 181.335,225.137
ELVSS: 2.0653.4 2.0653.5 2.0653.6 2.0653.7 2.0653.18 2.0653.79 2.0653.80 2.0653.81 2.0653.82 C4.1 D2.1 | length 25.1
  TopLayer w0.07: 2.0653.4@179.737,226.886 179.737,225.825 179.867,225.825 ; 2.0653.5@179.867,226.886 179.867,225.825 ; 2.0653.6@179.997,226.886 179.997,225.825 ; 2.0653.7@180.127,226.886 180.127,225.825 179.997,225.825 ; v1@181.557,225.556 2.0653.18@181.557,226.886 ; 2.0653.79@189.487,226.886 189.487,225.825 189.617,225.825 ; 2.0653.80@189.617,226.886 189.617,225.825 ; 2.0653.81@189.747,226.886 189.747,225.825 ; 2.0653.82@189.877,226.886 189.877,225.825 189.747,225.825 ; 179.867,225.825 179.937,225.825 179.997,225.825 ; 189.617,225.825 189.68,225.825 189.747,225.825
  TopLayer w0.25: D2.1@175.911,225.893 C4.1@176.675,225.893 ; C4.1@176.676,225.894 176.93,225.64 ccw(c177.142,225.852) 177.142,225.552 v1(179.937,225.552) 179.937,225.825 ; v1(189.68,225.538) 189.68,225.825
  BottomLayer w0.25: v1(179.937,225.552) v1@189.686,225.552
  other v1: 181.595,225.549
ELVSS_IN: C24.1 C25.1 D2.2 U1.A2 | length 3
  TopLayer w0.25: U1.A2@174.206,225.258 174.206,226.419 C24.1@174.177,226.448 174.942,226.448 C25.1@175.017,226.523 175.187,226.693 D2.2@175.911,226.693
GND: 2.0653.37 2.0653.38 2.0653.39 2.0653.43 2.0653.44 2.0653.45 2.0653.46 2.0653.47 2.0653.48 2.0653.49 2.0653.50 2.0653.51 2.0653.52 2.0653.72 C1.2 C2.2 C3.2 C4.2 C5.2 C6.2 C7.2 C8.2 C9.2 C10.2 C11.2 C12.2 C13.2 C14.2 C21.2 C23.2 C24.2 C25.2 C26.1 C27.1 C28.1 C29.2 C30.2 D1.2 J1.1 J1.7 J1.21 J2.1 U1.C2 U1.D2 | length 272.6
  TopLayer w0.07: 184.027,228.273 2.0653.37@184.027,226.886 184.027,225.825 184.157,225.825 ; 184.157,228.273 2.0653.38@184.157,226.886 184.157,225.825 ; 184.287,228.273 2.0653.39@184.287,226.886 184.287,225.825 184.157,225.825 ; 184.807,228.273 2.0653.43@184.807,226.886 184.807,225.817 185.117,225.507 ; 184.937,225.701 184.937,228.273 ; 185.067,225.654 2.0653.45@185.067,226.886 185.067,228.273 ; 185.197,225.691 2.0653.46@185.197,226.886 185.197,228.273 ; 185.327,225.661 2.0653.47@185.327,226.886 185.327,228.273 ; 185.457,228.273 2.0653.48@185.457,226.886 185.457,225.825 185.587,225.825 ; 185.587,228.273 2.0653.49@185.587,226.886 185.587,225.825 ; 185.717,228.273 2.0653.50@185.717,226.886 185.717,225.825 185.587,225.825 ; 185.778,225.648 185.977,225.846 2.0653.52@185.977,226.886 185.977,228.273 ; 185.847,225.716 2.0653.51@185.847,226.886 185.847,228.273 ; 188.577,223.84 2.0653.72@188.577,226.886 188.577,228.273
  TopLayer w0.1: 177.117,212.377 cw(c177.156,212.337) 177.156,212.393 177.745,212.393 ; 178.253,211.101 ccw(c178.253,211.343) 178.424,211.172 178.835,211.583
  TopLayer w0.2: J2.1@179.211,200.716 179.819,200.716 ccw(c179.819,200.854) 179.957,200.854 179.957,202.076 ; 185.149,208.529 ccw(c185.265,208.529) 185.265,208.413 205.319,208.413 cw(c205.319,207.218) 206.514,207.218 206.514,202.951 206.535,202.93 ; 185.384,213.722 ccw(c186.668,215.006) 186.668,213.19 205.241,213.19 cw(c205.241,208.456) 209.975,208.456 209.975,202.93 ; 185.587,222.563 185.587,225.825
  TopLayer w0.25: C8.2@171.603,214.108 cw(c172.069,213.643) 172.069,214.301 C10.2@172.407,214.301 ; v1@171.735,214.846 cw(c171.735,214.537) 171.953,214.755 C10.2@172.407,214.301 ; C10.2@172.447,214.261 C10.2@172.407,214.301 ; C7.2@173.271,213.581 C11.2@173.271,214.301 ; C14.2@173.564,220.118 ccw(c174.371,220.925) 174.371,219.784 C1.2@174.456,219.784 C2.2@175.176,219.784 C5.2@175.896,219.784 C6.2@176.616,219.784 176.871,219.784 ccw(c176.871,220.097) 177.092,219.876 cw(c177.454,219.515) 177.454,220.025 179.621,220.025 ccw(c179.621,220.966) 180.286,220.301 ; 174.206,223.369 U1.D2@174.206,224.058 U1.C2@174.206,224.458 ; C13.2@174.834,213.653 174.324,214.163 ccw(c173.991,213.83) C12.2@173.991,214.301 C11.2@173.271,214.301 ; 184.157,225.825 184.157,224.802 ccw(c185.319,224.802) 184.497,223.98 ; C10.2@172.407,214.301 C11.2@173.271,214.301
  BottomLayer w0.1: v1@177.487,222.648 cw(c177.748,222.648) 177.563,222.832 178.074,223.342 cw(c178.512,222.905) 178.512,223.524 178.684,223.524
  BottomLayer w0.15: 170.947,225.912 170.947,212.625 ccw(c172.448,212.625) 171.386,211.564 ; v1@180.947,212.707 182.103,213.862 182.103,222.9 cw(c182.541,222.9) 182.541,223.338 ; 183.762,220.707 183.387,220.332 183.387,211.838 ccw(c183.618,211.838) 183.618,211.607 205.384,211.607 cw(c205.384,207.999) 208.992,207.999 208.992,201.419 ccw(c209.242,201.419) 209.066,201.243 210.681,199.627 cw(c210.549,199.495) 210.736,199.495 210.736,199.386
  BottomLayer w0.2: J1.7@210.736,199.193 210.736,199.386
  BottomLayer w0.22: 177.143,209.125 205.401,209.125 cw(c205.401,208.016) 206.511,208.016 J1.21@206.511,199.193 ; 187.224,214.922 185.825,214.922 185.431,214.527 185.431,213.202 186.05,212.582 205.431,212.582 cw(c205.431,208.046) 209.967,208.046 209.967,202.27 ccw(c210.217,202.27) 210.041,202.093 212.506,199.627 212.561,199.627 J1.1@212.561,199.193
  other v1: 177.223,196.561 173.302,197.01 179.669,197.388 175.928,198.054 174.795,198.557 172.348,199.007 181.891,199.146 178.204,199.697 212.382,200.107 211.923,200.467 181.737,200.518 174.201,200.86 171.898,201.705 179.148,201.77 181.858,202.557 175.208,202.766 179.29,202.945 178.464,203.448 173.05,204.08 179.316,204.545 181.801,204.754 176.395,205.339 174.651,205.771 178.645,205.964 181.67,206.557 173.091,207.203 171.754,207.228 179.303,207.423 176.557,207.516 174.057,207.659 175.91,208.037 178.347,208.429 181.783,208.436 183.342,208.549 174.105,208.704 172.227,209.003 175.388,210.265 176.747,210.276 171.774,210.74 176.348,210.805 181.312,210.839 174.32,210.988 179.605,211.167 181.816,211.264 173.417,212.617 181.023,212.618 179.833,213.101 185.321,213.132 172.732,213.394 183.691,213.465 176.205,213.637 175.666,213.909 178.611,213.984 180.788,214.234 176.408,214.518 181.657,214.522 179.209,214.608 171.802,214.837 184.131,214.897 185.295,215.273 186.46,215.404 191.362,215.686 189.409,216.118 176.565,216.314 185.765,216.343 178.838,216.356 172.033,216.469 180.977,216.577 179.827,216.831 187.474,217.546 190.78,217.902 172.04,217.979 188.263,219.161 192.151,219.142 178.694,219.928 177.468,219.988 180.246,220.004 190.629,220.081 183.683,220.445 189.615,220.701 171.76,220.905 174.358,221.009 184.173,221.011 181.152,221.043 185.652,221.945 192.17,221.96 189.84,222.147 175.322,222.244 178.535,222.244 174.287,222.586 179.24,222.575 177.472,222.792 185.656,222.773 176.561,222.844 188.751,223.049 179.825,223.073 182.149,223.288 172.278,223.361 171.744,223.388 185.632,223.621 184.632,223.814 191.794,223.838 175.329,223.993 190.204,224.123 184.223,224.606 185.599,224.651 179.82,224.79 177.905,224.808 179.139,224.818 175.257,225.604 192.374,225.925 177.474,226.794 171.269,227.067 176.606,227.154 171.798,227.509 174.287,227.596 192.226,227.609 175.946,227.623 177.441,227.629 173.506,227.727
LX1: L1.2 U1.B1 | length 2.1
  TopLayer w0.2: L1.2@172.463,225.281 172.887,224.858 U1.B1@173.806,224.858 ; L1.2@172.682,225.298 173.106,224.874
LX2: L1.1 U1.C1 | length 2.1
  TopLayer w0.2: L1.1@172.463,224.031 172.889,224.458 U1.C1@173.806,224.458 ; L1.1@172.731,224.034 173.157,224.46
MTP: 2.0653.73 J1.19 | length 67.5
  TopLayer w0.07: 2.0653.73@188.707,226.886 188.707,224.592 ccw(c189.103,224.592) 188.823,224.312 v1(188.951,224.183)
  BottomLayer w0.12: v1(188.951,224.183) 177.774,224.183 ccw(c177.774,223.883) 177.561,224.095 177.138,223.671 ccw(c177.35,223.459) 177.05,223.459 177.05,211.608 ccw(c177.35,211.608) 177.138,211.396 178.75,209.784 ccw(c178.962,209.996) 178.962,209.696 205.267,209.696 cw(c205.267,207.882) 207.081,207.882 207.081,199.801 207.136,199.747 207.136,199.386
  BottomLayer w0.2: J1.19@207.136,199.193 207.136,199.386